# Altium PCB CR00041.PcbDoc
Units mm, origin at the board's own origin, x right, y up, seen from the top; angles counter-clockwise.
Board outline 18 x 19 mm, 2 copper layers (L 01 (Top), L 02), stack 1.506 mm thick; 16 components, 47 nets, 106 pads, 47 vias.
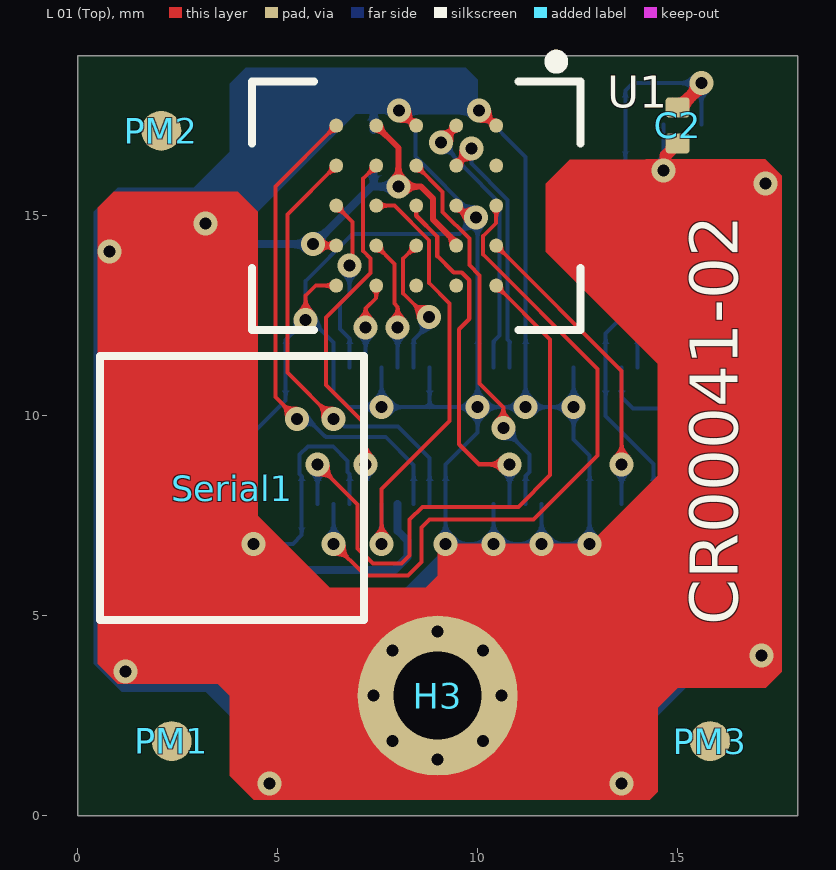
[diagram p0: L 01 (Top) view]
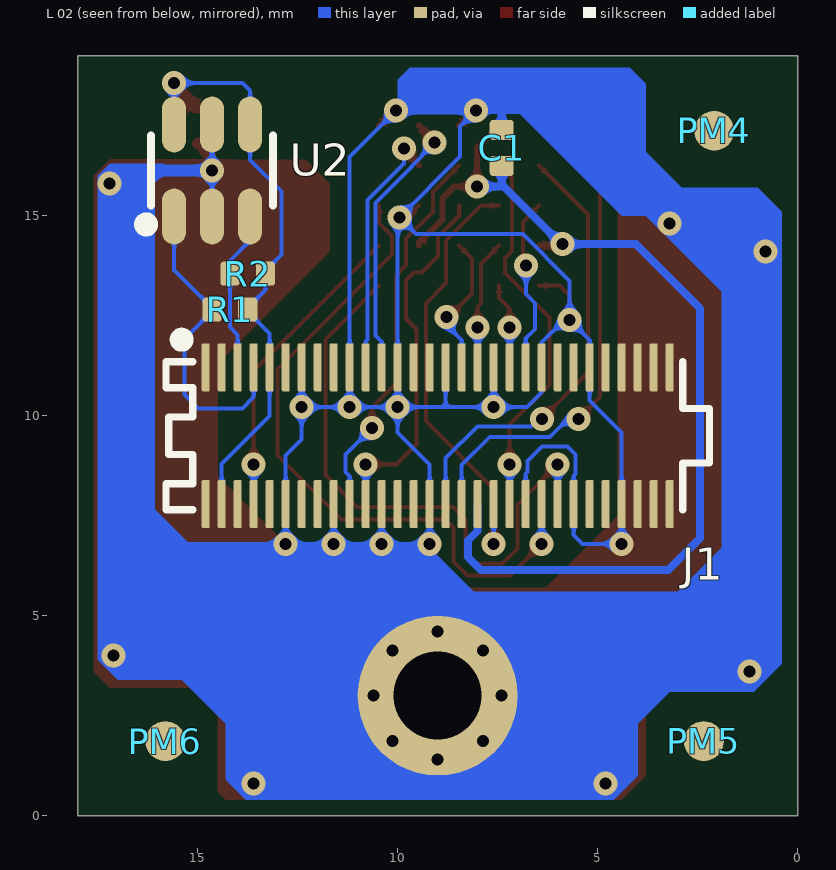
[diagram p1: L 02 view, seen from below]

## Layer stack, top to bottom
Top Solder: solder mask 0.0102, Solder Resist, Dk 3.5
L 01 (Top): signal copper 0.053
Dielectric1: core 1.4, FR-4, Dk 4.2
L 02: signal copper 0.053
Bottom Solder: solder mask 0.0102, Solder Resist, Dk 3.5

## Board outline
0,0 0,19 18.001,19 18.001,0

## Design rules (kind name [scope] priority, off if disabled: settings)
BoardOutlineClearance [All] p1: gap=0 ignorepadtopadclearanceinfootprint=FALSE except(0.5: Arc-OutlineEdge Track-OutlineEdge SMDPad-OutlineEdge THPad-OutlineEdge Via-OutlineEdge Fill-OutlineEdge Poly-OutlineEdge Region-OutlineEdge)
Clearance "HV Clearance" [(InNetClass('HV') AND InPolygon)] p1: gap=0.3 ignorepadtopadclearanceinfootprint=FALSE except(0: Arc-Hole Track-Hole SMDPad-Hole THPad-Hole Via-Hole Fill-Hole Poly-Hole Region-Hole Text-Hole)
Clearance Clearance_ToUnplatedHole [IsPad and ( (HoleSize = 1.5) or (HoleSize = 3.25) ) vs (IsVia or IsTrack OR InPoly)] p2: gap=0.2 ignorepadtopadclearanceinfootprint=FALSE except(0: Arc-Hole Track-Hole SMDPad-Hole THPad-Hole Via-Hole Fill-Hole Poly-Hole Region-Hole Text-Hole)
Clearance Clearance_DiffPair [(InDifferentialPairClass('All Differential Pairs')) vs (InPolygon)] p3: gap=0.3 ignorepadtopadclearanceinfootprint=FALSE except(0: Arc-Hole Track-Hole SMDPad-Hole THPad-Hole Via-Hole Fill-Hole Poly-Hole Region-Hole Text-Hole)
Clearance Clearance_PolyToPoly [(InPolygon) vs InNamedPolygon('L01_U1_IN') or    InNamedPolygon('L01_U1_OUT') or InNamedPolygon('L01_U1_PGND')   or InNamedPolygon('L01_U2_IN') or    InNamedPolygon('L01_U2_OUT') or InNamedPolygon('L01_U2_PGND')] p4: gap=0.2 ignorepadtopadclearanceinfootprint=FALSE except(0: Arc-Hole Track-Hole SMDPad-Hole THPad-Hole Via-Hole Fill-Hole Poly-Hole Region-Hole Text-Hole)
Clearance Clearance_Polygon [(InPolygon)] p5: gap=0.2 ignorepadtopadclearanceinfootprint=FALSE except(0: Arc-Hole Track-Hole SMDPad-Hole THPad-Hole Via-Hole Fill-Hole Poly-Hole Region-Hole Text-Hole; 0.7: Poly-Poly)
Clearance [All] p6: gap=0.125 ignorepadtopadclearanceinfootprint=FALSE except(0: Arc-Hole Track-Hole SMDPad-Hole THPad-Hole Via-Hole Fill-Hole Poly-Hole Region-Hole Text-Hole; 0.1: Track-Track Track-SMDPad Track-Via SMDPad-Via)
ComponentClearance ComponentClearance_logo [(HasFootprint('LOGO PRINT') or HasFootprint('FIDU-DOT - small'))] p1: gap=-0.05 collisioncheckmode=3 verticalgap=-0.1 showdistances=FALSE
ComponentClearance [All] p2: gap=-0.05 collisioncheckmode=3 verticalgap=0.254 showdistances=FALSE
DiffPairsRouting [InNetClass('Diff_IO') and not TouchesRoom('Room_MAX10')] p1: maxlimit=0.16 minlimit=0.16 mostfreqgap=0.16 toplayer_minwidth=0.11 toplayer_maxwidth=0.11 toplayer_prefwidth=0.11 bottomlayer_minwidth=0.11 bottomlayer_maxwidth=0.11 bottomlayer_prefwidth=0.11 maxuncoupledlength=2
FabricationTestPointUsage TestPointUsage [All] p1: valid=0 allowmultiple=FALSE
FabricationTestpoint Testpoint [All] p1: side=3 testpointundercomponent=TRUE minsize=1.016 maxsize=2.54 preferedsize=1.524 minholesize=0 maxholesize=1.016 preferedholesize=0.813 testpointgrid=0.025 allowsidetop=TRUE allowsidebottom=TRUE usegrid=TRUE gridtolerance=0
HoleSize [All] p1: absolutevalues=TRUE maxlimit=5 minlimit=0.2 maxpercent=80.000 minpercent=20.000
MinimumAnnularRing [All] p1: minimumring=0.15
MinimumSolderMaskSliver [All] p1: minsoldermaskwidth=0.1
PlaneClearance [All] p1: clearance=0.4
PlaneConnect [All] p1: planeconnectstyle=Direct reliefexpansion=0.508 reliefentries=4 reliefconductorwidth=0.254 reliefairgap=0.254
PolygonConnect [IsVia] p1: connectstyle=Direct reliefconductorwidth=0.254 reliefentries=4 polygonreliefangle="90 Angle" airgapwidth=0.254
PolygonConnect PolygonConnect_1 [All] p2: connectstyle=Relief reliefconductorwidth=0.254 reliefentries=4 polygonreliefangle="90 Angle" airgapwidth=0.254
RoutingCorners [All] p1: cornerstyle=Round minsetback=2 maxsetback=2
RoutingVias [All] p1: holewidth=0.3 width=0.6 viastyle="Through Hole" minholewidth=0.2 minwidth=0.5 maxholewidth=1 maxwidth=3
SilkToSilkClearance [All] p1: silktosilkclearance=0.025
SilkToSolderMaskClearance SilkscreenOverComponentPads [IsPad] p1: minsilkscreentomaskgap=0.01 clearancetoexposedcopper=TRUE
SolderMaskExpansion SolderMaskExpansion_VIA [(IsVia)] p1: expansion=0 istentingtop=FALSE soldermaskfromhole=TRUE
SolderMaskExpansion [All] p2: expansion=0 istentingtop=FALSE
Width [All] p1: maxlimit=3 minlimit=0.1 preferedwidth=0.1 minimp=50.000000 maximp=50.000000 favimp=50.000000 checkconnectedcopper=TRUE
19 further rules are at their usual default settings.

## Classes and differential pairs
component class CRUVI: C1 C2 H3 J1 R1 R2 SNAP1 U1 U2
component class CR00041: PM1 PM2 PM3 PM4 PM5 PM6 Serial1
differential pair CLK: +CLK_P -CLK_N

## Components (designator, comment, footprint, x,y, rotation, side; value= is the part's Value field where it differs from the comment)
C1 "470nF" CAPC1005X55N 7.4,16.695 r90 bottom value=470n
C2 "470nF" CAPC1005X55N 14.998,17.257 r270 top value=470n
H3 "Mount.Hole 2mm" MHole2_2mm 9,3 r0 top locked
J1 "ST4-30-1.50-L-D-P-TR" ST4-30-1_50-L-D 9,9.5 r180 bottom locked
PM1 "FIDU-DOT - mini" "FIDU-DOT - mini" 2.348,1.865 r0 top
PM2 "FIDU-DOT - mini" "FIDU-DOT - mini" 2.089,17.124 r0 top
PM3 "FIDU-DOT - mini" "FIDU-DOT - mini" 15.808,1.865 r90 top
PM4 "FIDU-DOT - mini" "FIDU-DOT - mini" 2.089,17.124 r180 bottom
PM5 "FIDU-DOT - mini" "FIDU-DOT - mini" 2.348,1.865 r180 bottom
PM6 "FIDU-DOT - mini" "FIDU-DOT - mini" 15.808,1.865 r90 bottom
R1 "4K7" RESC1005X40N 14.195,12.653 r0 bottom value=4.7K
R2 "4K7" RESC1005X40N 13.75,13.55 r0 bottom value=4.7K
Serial1 "Serialnumber 6,3 x 6.3mm" Serial_6.3x6.3mm 3.861,8.192 r0 top
SNAP1 "SNAP CRUVI 3x" CRUVI_3X_SNAP 31.86,28 r0 top locked
U1 "S26KS512SDPBHI00x" BGA25C100P5X5_800X600X120N 8.463,15.251 r270 top locked
U2 "24AA025E48T-I/OT" SOT95P280X145-6N 14.641,16.132 r90 bottom locked

## Footprints (in the part's own frame and the unit in brackets; to place one, negate y for a bottom-side part, rotate by r counter-clockwise, add the part's x,y. Pads: shape width x height; smd on the part's side, far side on the other; paste and mask are expansions set on the pad)
BGA25C100P5X5_800X600X120N [mm]
  round 0.35 smd: A1(-2,2) A2(-1,2) A3(0,2) A4(1,2) A5(2,2) B1(-2,1) B2(-1,1) B3(0,1) B4(1,1) B5(2,1) C1(-2,0) C2(-1,0) C3(0,0) C4(1,0) C5(2,0) D1(-2,-1) D2(-1,-1) D3(0,-1) D4(1,-1) D5(2,-1) E1(-2,-2) E2(-1,-2) E3(0,-2) E4(1,-2) E5(2,-2)
  silkscreen extent -3.75,-4.11 3.11,4.11, body extent -3.05,-4.05 3.05,4.05, height 1.21
CAPC1005X55N [mm] "Vishay VJ0402 1 x 0.5mm (+/- 0.05), 0.25mm +0.05/-0.1mm Kontakte"
  rrect33% 0.5x0.6 smd: 1(-0.45,0) 2(0.45,0)
  body extent -0.5,-0.25 0.5,0.25, height 0.5
CRUVI_3X_SNAP [mm]
"FIDU-DOT - mini" [mm]
  round 1 smd paste-1: 0(0,0)
MHole2_2mm [mm]
  round 4 hole 2.2: 1(0,0)
RESC1005X40N [mm] "Vishay D0402 1 x 0.5mm (+/- 0.05), 0.2mm +/-0.1mm Kontakte"
  rrect33% 0.48x0.6 smd: 1(-0.445,0) 2(0.445,0)
  body extent -0.5,-0.25 0.5,0.25, height 0.35
Serial_6.3x6.3mm [mm]
  silkscreen extent -3.3,-3.3 3.3,3.3, body extent -3,-3 3,3, height 0.21
SOT95P280X145-6N [mm]
  oval 1.4x0.6 smd: 1(-1.15,0.95) 2(-1.15,0) 3(-1.15,-0.95) 4(1.15,-0.95) 5(1.15,0) 6(1.15,0.95)
  silkscreen extent -1.5,-1.53 0.87,1.8, body extent -1.35,-1.45 1.35,1.45, height 1.45
ST4-30-1_50-L-D [mm]
  rrect33% 0.2x1.2 smd: 1(-5.8,1.71) 2(-5.8,-1.71) 3(-5.4,1.71) 4(-5.4,-1.71) 5(-5,1.71) 6(-5,-1.71) 7(-4.6,1.71) 8(-4.6,-1.71) 9(-4.2,1.71) 10(-4.2,-1.71) 11(-3.8,1.71) 12(-3.8,-1.71) 13(-3.4,1.71) 14(-3.4,-1.71) 15(-3,1.71) 16(-3,-1.71) 17(-2.6,1.71) 18(-2.6,-1.71) 19(-2.2,1.71) 20(-2.2,-1.71) 21(-1.8,1.71) 22(-1.8,-1.71) 23(-1.4,1.71) 24(-1.4,-1.71) 25(-1,1.71) 26(-1,-1.71) 27(-0.6,1.71) 28(-0.6,-1.71) 29(-0.2,1.71) 30(-0.2,-1.71) 31(0.2,1.71) 32(0.2,-1.71) 33(0.6,1.71) 34(0.6,-1.71) 35(1,1.71) 36(1,-1.71) 37(1.4,1.71) 38(1.4,-1.71) 39(1.8,1.71) 40(1.8,-1.71) 41(2.2,1.71) 42(2.2,-1.71) 43(2.6,1.71) 44(2.6,-1.71) 45(3,1.71) 46(3,-1.71) 47(3.4,1.71) 48(3.4,-1.71) 49(3.8,1.71) 50(3.8,-1.71) 51(4.2,1.71) 52(4.2,-1.71) 53(4.6,1.71) 54(4.6,-1.71) 55(5,1.71) 56(5,-1.71) 57(5.4,1.71) 58(5.4,-1.71) 59(5.8,1.71) 60(5.8,-1.71)
  silkscreen extent -6.79,-1.85 6.79,2.55, body extent -6.87,-2 6.71,2, height 3.56

## Part data
C1 C2: library part 23659, "KON 470nF 6,3V X5R SMD BF 1005 (0402)", Case="1005 (0402)", Temperature-Range=-55/+85, Voltage=6.3V, AN=23659, Mixed=SMT, Preferred=Yes, Technology=X5R
H3: library part 27273, AN=27273, Mixed=THT
J1: library part 29686, Case=ST4, Temperature-Range=-55/+125, AN=29686, H-ART=ST4-30-1.50-L-D-P-TR, HelpURL=b:\AD\adlib\datasheet\Samtec_ST4\, Mixed=SMT
PM1 PM2 PM3 PM4 PM5 PM6: library part 27037, "FIDU-DOT - MINI 0.5mm", AN=27037, Mixed=FIDU
R1 R2: library part 22585, "WID SMD 4K7 1% 0,063W BF 1005 (0402)", Case="1005 (0402)", Tolerance=1%, AN=22585, H-ART=RC0402FR-134K7L, Mixed=SMT, Preferred=Yes, Technology=TK100
Serial1: library part 26753, AN=26753, H-ART=39068, Mixed=MECH
SNAP1: library part 29977, "SNAP for CRUVI 3x", AN=29977
U1: library part 26436, "S26KS512SDPBHI00x 1.8V", Case=TFBGA25, AN=26436, H-ART=S26KS512SDPBHI00x, HelpURL=B:\ad\adlib\datasheet\S26KS_KL-S, Mixed=SMT, Preferred=Yes, Trenz-Stock=Yes
U2: library part 26249, Case=SOT23-6, Temperature-Range=-40/+85, AN=26249, H-ART=24AA025E48T-I/OT, HelpURL=B:\AD\adlib\datasheet\24AA02xExx, Mixed=SMT

## Via types
v1: diameter 0.6, hole 0.3, L 01 (Top) to L 02, 47 vias

## Nets (pads, with @x,y where several pads share a name; then routed paths per layer and width w, separated by ;. In a path a pad name is that pad's centre, name@x,y a point inside that pad or via, vN(x,y) a via of type N, cw(c..) or ccw(c..) an arc to the next point about the centre after c; other vN are vias at no path point)
+3.3V_D: C2.1 J1.4 J1.9 R1.1 R2.1 U2.4 U2.6 | length 15.6
  L 01 (Top) w0.3: C2.1 15.048,17.707 15.591,18.249 v1(15.591,18.318)
  L 02 w0.1: R2.1@13.115,13.816 13.305,13.626 13.305,13.143 13.75,12.698 13.75,12.608 13.2,12.058 J1.9 13.2,9.989 14.4,8.789 J1.4 ; R2.1@13.115,13.817 12.9,14.032 12.9,15.6 13.691,16.391 13.691,18.131 13.878,18.318 v1(15.591,18.318) U2.6
+5.0V_D: J1.60
A0_N: J1.16
A0_P: J1.14
A2_N: J1.28
A2_P: J1.26
B0_N: J1.17
B0_P: J1.15
B2_N: J1.29
B2_P: J1.27
B5_N: J1.47
B5_P: J1.45
CLK_N: J1.23 U1.B1 | length 6.9
  L 01 (Top) w0.15: v1@9.043,16.831 9.076,16.847 9.117,16.867 9.137,16.876 U1.B1
  L 02 w0.1: v1(9.087,16.826) 9.389,16.524 9.389,16.489 9.639,16.239 9.639,16.225 10.55,15.315 10.55,12.01 10.4,11.86 J1.23
CLK_P: J1.21 U1.B2 | length 6.5
  L 01 (Top) w0.15: U1.B2 9.789,16.626 9.809,16.635 9.849,16.655 v1@9.883,16.671
  L 02 w0.1: v1(9.839,16.676) 9.839,16.308 10.75,15.398 10.75,11.91 10.8,11.86 J1.21
CS0: J1.20 U1.C2 | length 9.7
  L 01 (Top) w0.1: U1.C2 9.12,15.594 9.12,15.098 9.79,14.428 9.79,13.764 10.042,13.511 10.042,10.81 10.641,10.211 v1(10.641,9.689)
  L 02 w0.1: v1(10.641,9.689) 11.3,9.03 11.3,8.598 11.2,8.498 J1.20
CS1: J1.44 U1.A3 | length 17.2
  L 01 (Top) w0.1: v1(6.4,6.795) 7.195,6 8.255,6 8.6,6.345 8.6,7.2 8.8,7.4 11.4,7.4 13,9 13,11.174 10.138,14.036 10.138,14.489 10.463,14.814 U1.A3
  L 02 w0.1: v1(6.4,6.795) J1.44
D0: J1.38 U1.D3 | length 11.2
  L 01 (Top) w0.1: U1.D3 7.923,15.251 8.788,14.386 8.788,13.321 9.299,12.809 9.299,9.87 7.6,8.17 v1(7.6,6.795)
  L 02 w0.1: v1(7.6,6.795) J1.38
D1: J1.40 U1.D2 | length 9.5
  L 01 (Top) w0.1: v1(7.2,8.785) 7.2,9.784 6.212,10.773 6.212,12.459 7.324,13.572 7.324,13.93 7.138,14.116 7.138,15.926 U1.D2
  L 02 w0.1: J1.40 v1(7.2,8.785)
D2: J1.33 U1.C4 | length 3.6
  L 01 (Top) w0.1: U1.C4 8.138,13.926 8.138,13.05 v1@8.749,12.439
  L 02 w0.1: J1.33 8.4,11.892 8.777,12.269 v1(8.777,12.468)
D3: J1.35 U1.D4 | length 3.3
  L 01 (Top) w0.1: U1.D4 7.916,13.798 7.916,12.807 8,12.723 v1(8,12.205)
  L 02 w0.1: J1.35 v1(8,12.205)
D4: J1.39 U1.D5 | length 2.1
  L 01 (Top) w0.1: v1(7.2,12.205) 7.2,12.685 7.463,12.947 U1.D5
  L 02 w0.1: J1.39 v1(7.2,12.205)
D5: J1.41 U1.E3 | length 4.5
  L 01 (Top) w0.1: U1.E3 6.873,14.841 v1@6.873,13.761
  L 02 w0.1: v1@6.713,13.681 v1(6.793,13.761) 6.793,13.041 6.563,12.81 6.563,12.167 6.8,11.93 J1.41
D6: J1.32 U1.E2 | length 11.3
  L 01 (Top) w0.1: v1(6.393,9.924) 5.239,11.078 5.239,15.027 U1.E2
  L 02 w0.1: v1(6.393,9.924) 6.48,9.924 6.671,9.733 8.007,9.733 8.8,8.939 J1.32
D7: J1.34 U1.E1 | length 12.6
  L 01 (Top) w0.1: v1(5.485,9.921) 4.939,10.467 4.939,15.727 U1.E1
  L 02 w0.1: v1(5.485,9.921) 5.749,9.921 6.175,9.494 6.186,9.494 6.206,9.474 7.693,9.474 8.4,8.767 J1.34
GND: C1.2 C2.2 H3.1 J1.12 J1.13 J1.18 J1.19 J1.24 J1.25 J1.30 J1.31 J1.37 J1.42 J1.43 J1.48 J1.49 J1.54 U1.A1 U1.B3 U1.C1 U1.E5 U2.2 U2.5 | length 87
  L 01 (Top) w0.1: v1(5.7,12.398) 5.7,13 5.951,13.251 U1.E5 ; U1.B3 v1@9.855,14.859
  L 01 (Top) w0.15: v1@8.043,17.671 8.059,17.638 8.079,17.597 8.088,17.577 U1.C1 ; v1@10.043,17.671 10.059,17.638 10.079,17.597 10.088,17.577 U1.A1
  L 01 (Top) w0.2: v1(14.641,16.132) v1@14.698,16.189
  L 01 (Top) w0.3: v1@14.698,16.189 14.698,16.507 14.848,16.657 14.848,16.707 14.948,16.807 C2.2
  L 02 w0.1: J1.42 6.8,8.548 6.75,8.598 6.75,8.873 6.388,9.235 5.752,9.235 5.55,9.033 5.55,8.548 5.6,8.498 J1.48 5.6,7.013 5.383,6.795 v1(4.4,6.795) J1.54 4.4,9.578 5.2,10.378 J1.49 5.2,11.897 v1(5.7,12.398) ; J1.37 v1(7.6,10.215) ; v1(8.038,17.627) 8.439,17.227 8.439,16.475 v1(9.955,14.959) ; J1.31 8.8,10.215 ; H3.1 9.2,3.2 v1(9.2,6.795) ; v1(10.038,17.627) 11.2,16.466 J1.19 v1(11.2,10.215) ; J1.24 v1(10.4,6.795) ; J1.18 v1(11.6,6.795) ; J1.13 v1(12.4,10.215) ; U2.2 v1(14.641,16.132) ; U2.5 v1(14.641,16.132) ; v1(5.7,12.398) 5.7,13.373 6.873,14.546 9.542,14.546 v1(9.955,14.959) ; v1(5.7,12.398) 5.791,12.398 5.811,12.418 6.4,11.829 J1.43 6.4,10.584 6.769,10.215 v1(7.6,10.215) ; v1(7.6,10.215) 8.8,10.215 ; 8.8,10.215 v1(10,10.215) ; v1(9.2,6.795) J1.30 9.2,8.782 10,9.582 v1(10,10.215) ; v1(9.2,6.795) v1(10.4,6.795) ; v1(9.955,14.959) 10,14.914 J1.25 v1(10,10.215) ; v1(10,10.215) v1(11.2,10.215) ; v1(10.4,6.795) v1(11.6,6.795) ; v1(11.2,10.215) v1(12.4,10.215) ; v1(11.6,6.795) v1(12.8,6.795) ; v1(12.4,10.215) 12.4,9.4 12.8,9 J1.12 v1(12.8,6.795) ; v1(12.8,6.795) 15.266,6.795 16.112,7.642 16.112,15.861 15.842,16.132 v1(14.641,16.132)
  L 02 w0.2: C1.2 7.4,17.573 7.499,17.672 7.993,17.672 v1(8.038,17.627) v1(10.038,17.627)
  L 02 w0.3: v1(14.641,16.132) 16.368,16.132 16.5,16
  other v1: 4.8,0.8 13.6,0.8 9,1.4 7.869,1.869 10.132,1.869 7.4,3 10.6,3 1.2,3.6 17.1,4 7.869,4.131 10.131,4.131 9,4.6 0.8,14.1 3.2,14.8 17.2,15.8
HSI: J1.10
HSIO: J1.2
HSO: J1.6
INT: J1.46 U1.A5 | length 15.2
  L 01 (Top) w0.1: v1(6,8.785) 7,7.785 7,6.679 7.379,6.3 8.1,6.3 8.3,6.5 8.3,7.4 8.618,7.718 11.014,7.718 11.812,8.515 11.812,11.902 U1.A5
  L 02 w0.1: J1.46 v1(6,8.785)
JTAGEN: J1.57
NetU1_A2: U1.A2
NetU1_B5: U1.B5
NetU1_C5: U1.C5
REFCLK: J1.11
RESET: J1.8 U1.A4 | length 7.8
  L 01 (Top) w0.1: U1.A4 13.6,11.114 v1(13.6,8.785)
  L 02 w0.1: J1.8 v1(13.6,8.785)
RFU1: J1.1
RWDS: J1.22 U1.C3 | length 9.2
  L 01 (Top) w0.11: U1.C3 8.463,15.001 8.993,14.471 8.993,13.99 9.402,13.581 9.6,13.581 9.793,13.388 9.793,12.421 9.531,12.159 9.531,9.287 10.033,8.785 v1(10.8,8.785)
  L 02 w0.1: J1.22 v1(10.8,8.785)
SMB_ALERT: J1.3
SMB_SCL: J1.7 R1.2 U2.1 | length 7.9
  L 02 w0.1: J1.7 13.6,10.463 13.882,10.181 14.992,10.181 15.336,10.525 15.336,11.913 14.64,12.608 14.64,12.698 15.591,13.648 U2.1
SMB_SDA: J1.5 R2.2 U2.3 | length 4.1
  L 02 w0.1: U2.3 13.691,14.378 14.195,13.874 R2.2 14.195,12.215 14,12.02 J1.5
TCK: J1.59
TDI: J1.51
TDO: J1.53
TMS: J1.55
USB_N: J1.58
USB_P: J1.56
VADJ: C1.1 J1.36 U1.B4 U1.D1 U1.E4 | length 25.6
  L 01 (Top) w0.15: v1(5.876,14.287) 5.912,14.251 U1.E4 ; U1.D1 8.019,16.695 v1(8.019,15.729) 8.584,15.729 8.878,15.435 8.878,14.911 9.463,14.326 U1.B4
  L 02 w0.2: C1.1 7.4,15.781 7.347,15.729 ; J1.36 8,7.123 8.248,6.875 8.248,6.471 7.923,6.145 3.237,6.145 2.438,6.944 2.438,12.682 4.043,14.287 v1(5.876,14.287) 5.876,14.257 7.347,15.729 ; v1(8.019,15.729) 7.347,15.729
pads on no net: J1.50 J1.52 PM1.0 PM2.0 PM3.0 PM4.0 PM5.0 PM6.0

## Other copper
L 01 (Top):
  region net GND: 12.8,6.795 9.195,6.795 9,6.6 9,6 8.7,5.7 6.3,5.7 4.5,7.5 4.5,15.1 4,15.6 0.9,15.6 0.5,15.2 0.5,3.8 1,3.3 3.5,3.3 3.8,3 3.8,1 4.4,0.4 14.3,0.4 14.5,0.6 14.5,2.7 15,3.2 17.2,3.2 17.6,3.6 17.6,16 17.193,16.407 14.207,16.407 12.3,16.4 11.7,15.8 11.7,14.1 14.5,11.3 14.5,8.495
L 02:
  region net GND: 15.285,6.785 15.271,6.8 9.2,6.8 9.2,6.7 8.1,5.6 3,5.6 1.9,6.7 1.9,13.1 3.8,15 4.4,15 6.945,17.545 9.956,17.545 10.038,17.627 10,17.666 10,18.4 9.7,18.7 4.2,18.7 3.8,18.3 3.8,16.6 2.9,15.7 1,15.7 0.4,15.1 0.4,3.8 1.1,3.1 3.2,3.1 4,2.3 4,1 4.6,0.4 13.8,0.4 14.3,0.9 14.3,2.3 15.4,3.4 17,3.4 17.5,3.9 17.5,16 17.2,16.3 15.842,16.3 15.842,16.058 16.1,15.8 16.1,7.6

## Silkscreen, mask and mechanical layers (free items; w line width, h text height)
Top Overlay:
  text "CR00041-02" at 16.496,4.761 h1.2 r90
Dim-Top-GM1:
  text "Top View" at 0.542,23.515 h2
Dim-Bot-GM2:
  text "Top View" at 0.542,23.515 h2
PCB-Outline-GM6:
  the board outline again, w0.01
Assembly-Top-GM13:
  text "'.Project'-'.Revision'-'.VariantName'" at 1.109,27.951 h1.5
  text "Variant name:" at -14.891,27.88 h1.5
  text "Top View" at 0.542,23.519 h2
Assembly-Bot-GM14:
  text "'.Project'-'.Revision'-'.VariantName'" at 13.656,27.951 h1.5
  text "Variant name:" at 29.656,27.88 h1.5
  text "Bottom View" at 18.083,23.443 h2

## Dimensions
0,0 to 18.001,0 on Dim-Top-GM1
18.001,19 to 18.001,0 on Dim-Top-GM1
10,9.5 to 9,3 on Dim-Top-GM1
9,3 to 18.001,0 on Dim-Top-GM1

## Text inside footprints (layer, text, board x,y; h text height)
J1: Assembly-Bot-GM14 "1" at 14.717,10.5 h0.5; Assembly-Bot-GM14 "2" at 14.8,8 h0.5; Assembly-Bot-GM14 "60" at 4.1,8 h0.5; Assembly-Bot-GM14 "59" at 4.1,10.5 h0.5
Serial1: Assembly-Top-GM13 "SerialNr" at 1.445,11.584 h0.7
SNAP1: TDev-Notes-Top-GM11 "1" at 60.16,27 h0.7; TDev-Notes-Top-GM11 "2" at 59.96,32.1 h0.7; TDev-Notes-Top-GM11 "12" at 48.86,32.1 h0.7; TDev-Notes-Top-GM11 "11" at 48.86,27 h0.7; TDev-Notes-Top-GM11 "2" at 61.02,6.8 h0.7; TDev-Notes-Top-GM11 "1" at 61.12,11.6 h0.7; TDev-Notes-Top-GM11 "59" at 47.32,11.6 h0.7; TDev-Notes-Top-GM11 "60" at 47.32,6.8 h0.7; TDev-Notes-Top-GM11 "60" at 24.46,6.8 h0.7; TDev-Notes-Top-GM11 "59" at 24.46,11.6 h0.7; TDev-Notes-Top-GM11 "1" at 38.26,11.6 h0.7; TDev-Notes-Top-GM11 "2" at 38.16,6.8 h0.7; TDev-Notes-Top-GM11 "11" at 26,27 h0.7; TDev-Notes-Top-GM11 "12" at 26,32.1 h0.7; TDev-Notes-Top-GM11 "2" at 37.1,32.1 h0.7; TDev-Notes-Top-GM11 "1" at 37.3,27 h0.7; TDev-Notes-Top-GM11 "2" at 15.3,6.8 h0.7; TDev-Notes-Top-GM11 "1" at 15.4,11.6 h0.7; TDev-Notes-Top-GM11 "59" at 1.6,11.6 h0.7; TDev-Notes-Top-GM11 "60" at 1.6,6.8 h0.7; TDev-Notes-Top-GM11 "1" at 14.44,27 h0.7; TDev-Notes-Top-GM11 "2" at 14.24,32.1 h0.7; TDev-Notes-Top-GM11 "12" at 3.14,32.1 h0.7; TDev-Notes-Top-GM11 "11" at 3.14,27 h0.7; TDev-Notes-Top-GM11 "HS X connector" at 1.1,12.9 h0.7; TDev-Notes-Top-GM11 "HS Y connector" at 23.96,12.9 h0.7; TDev-Notes-Top-GM11 "HS Z connector" at 46.82,12.9 h0.7; TDev-Notes-Top-GM11 "LS C connector" at 48.52,25.75 h0.7; TDev-Notes-Top-GM11 "LS B connector" at 25.66,25.75 h0.7; TDev-Notes-Top-GM11 "LS A connector" at 2.8,25.725 h0.7